# Altium PCB Ctrl-FOC-Lite.PcbDoc
Units mm, origin at the board's own origin, x right, y up, seen from the top; angles counter-clockwise.
Board outline 34.01 x 34.01 mm, 4 copper layers (Top1, Gnd2, Signal3, Bottom4), stack 1.043 mm thick; 59 components, 48 nets, 243 pads, 0 vias.
Unrouted connection lines stored in the file: 164.
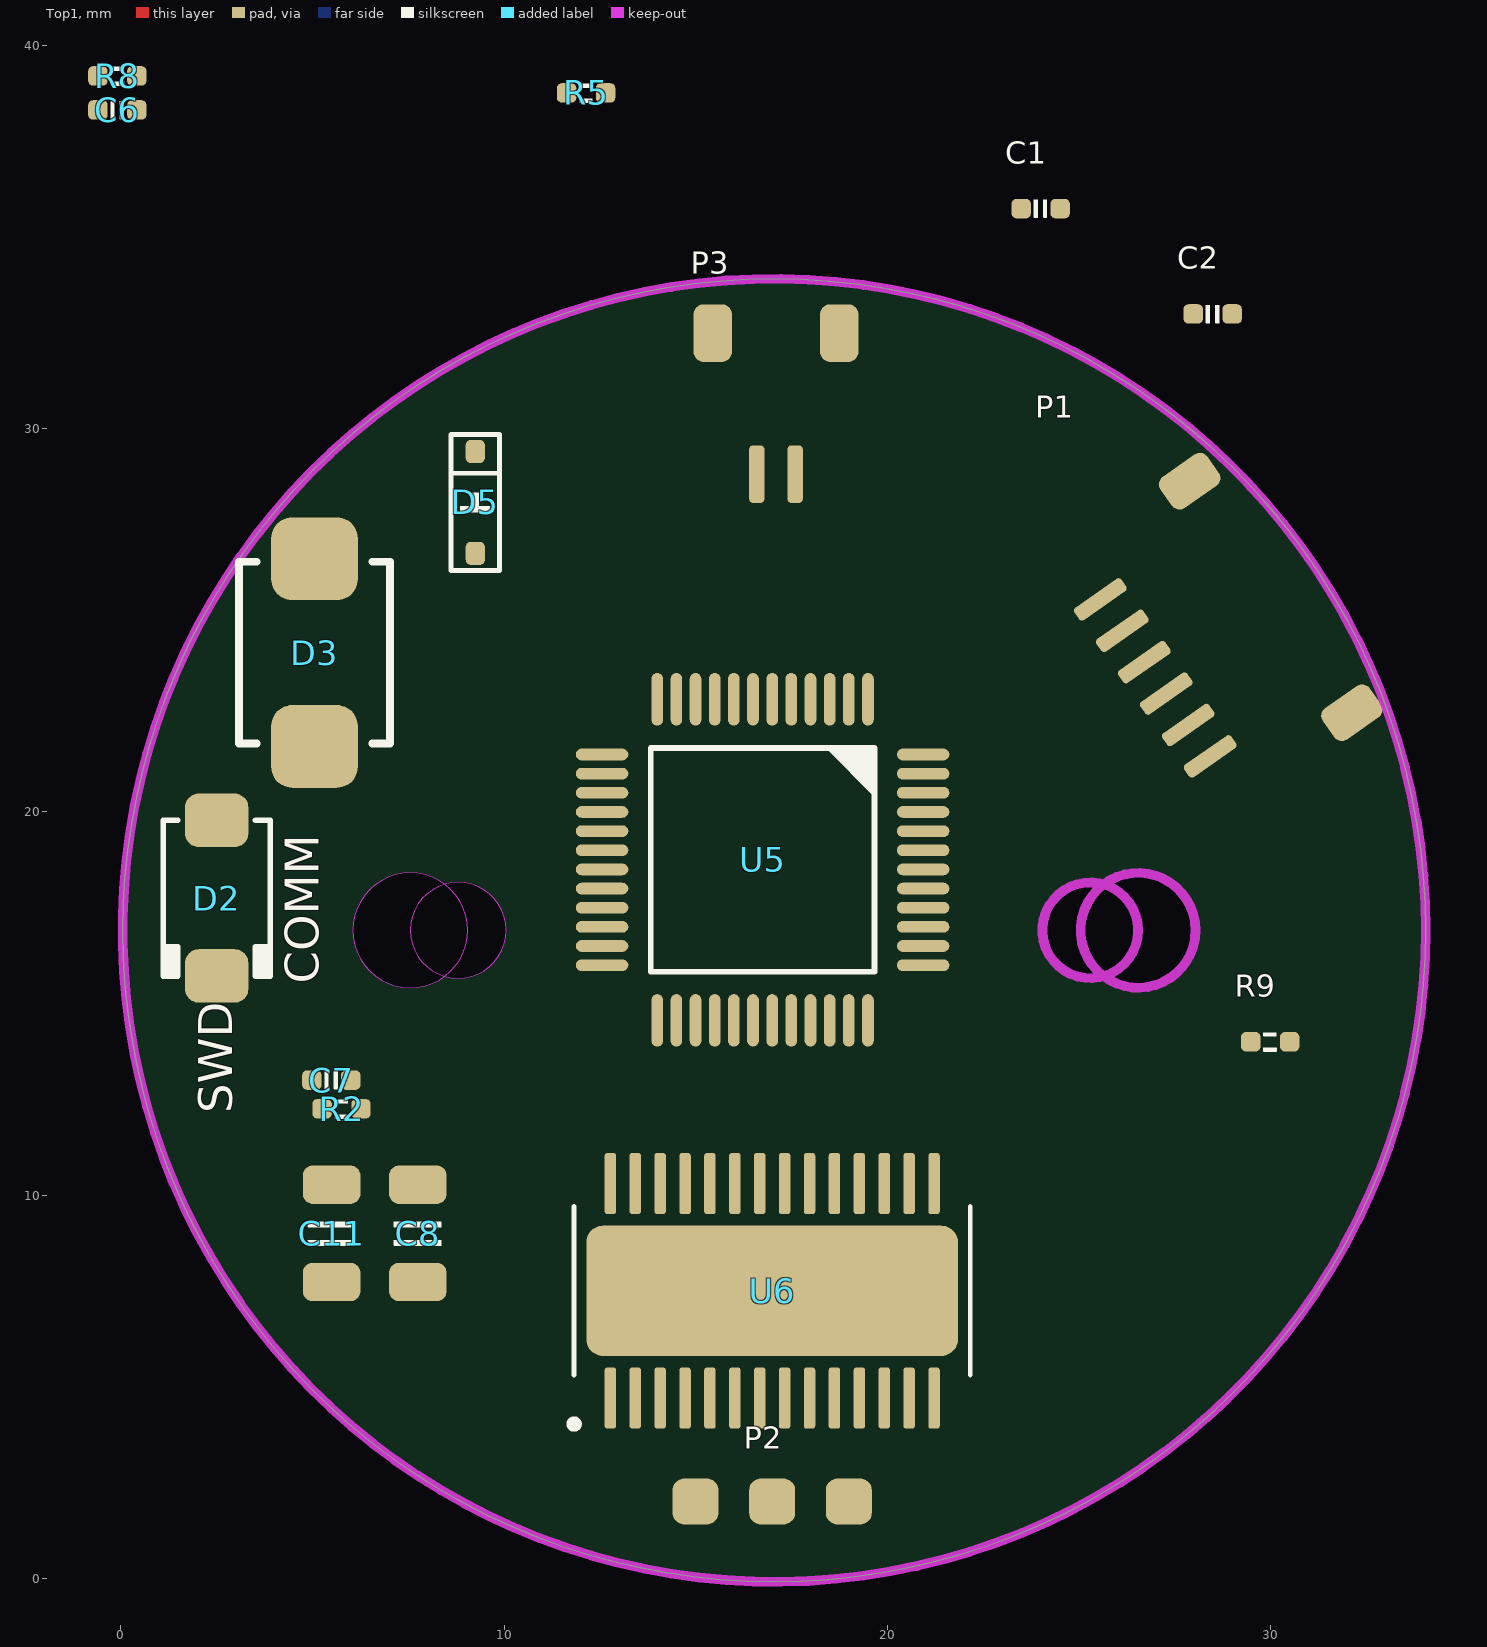
[diagram p0: Top1 view]
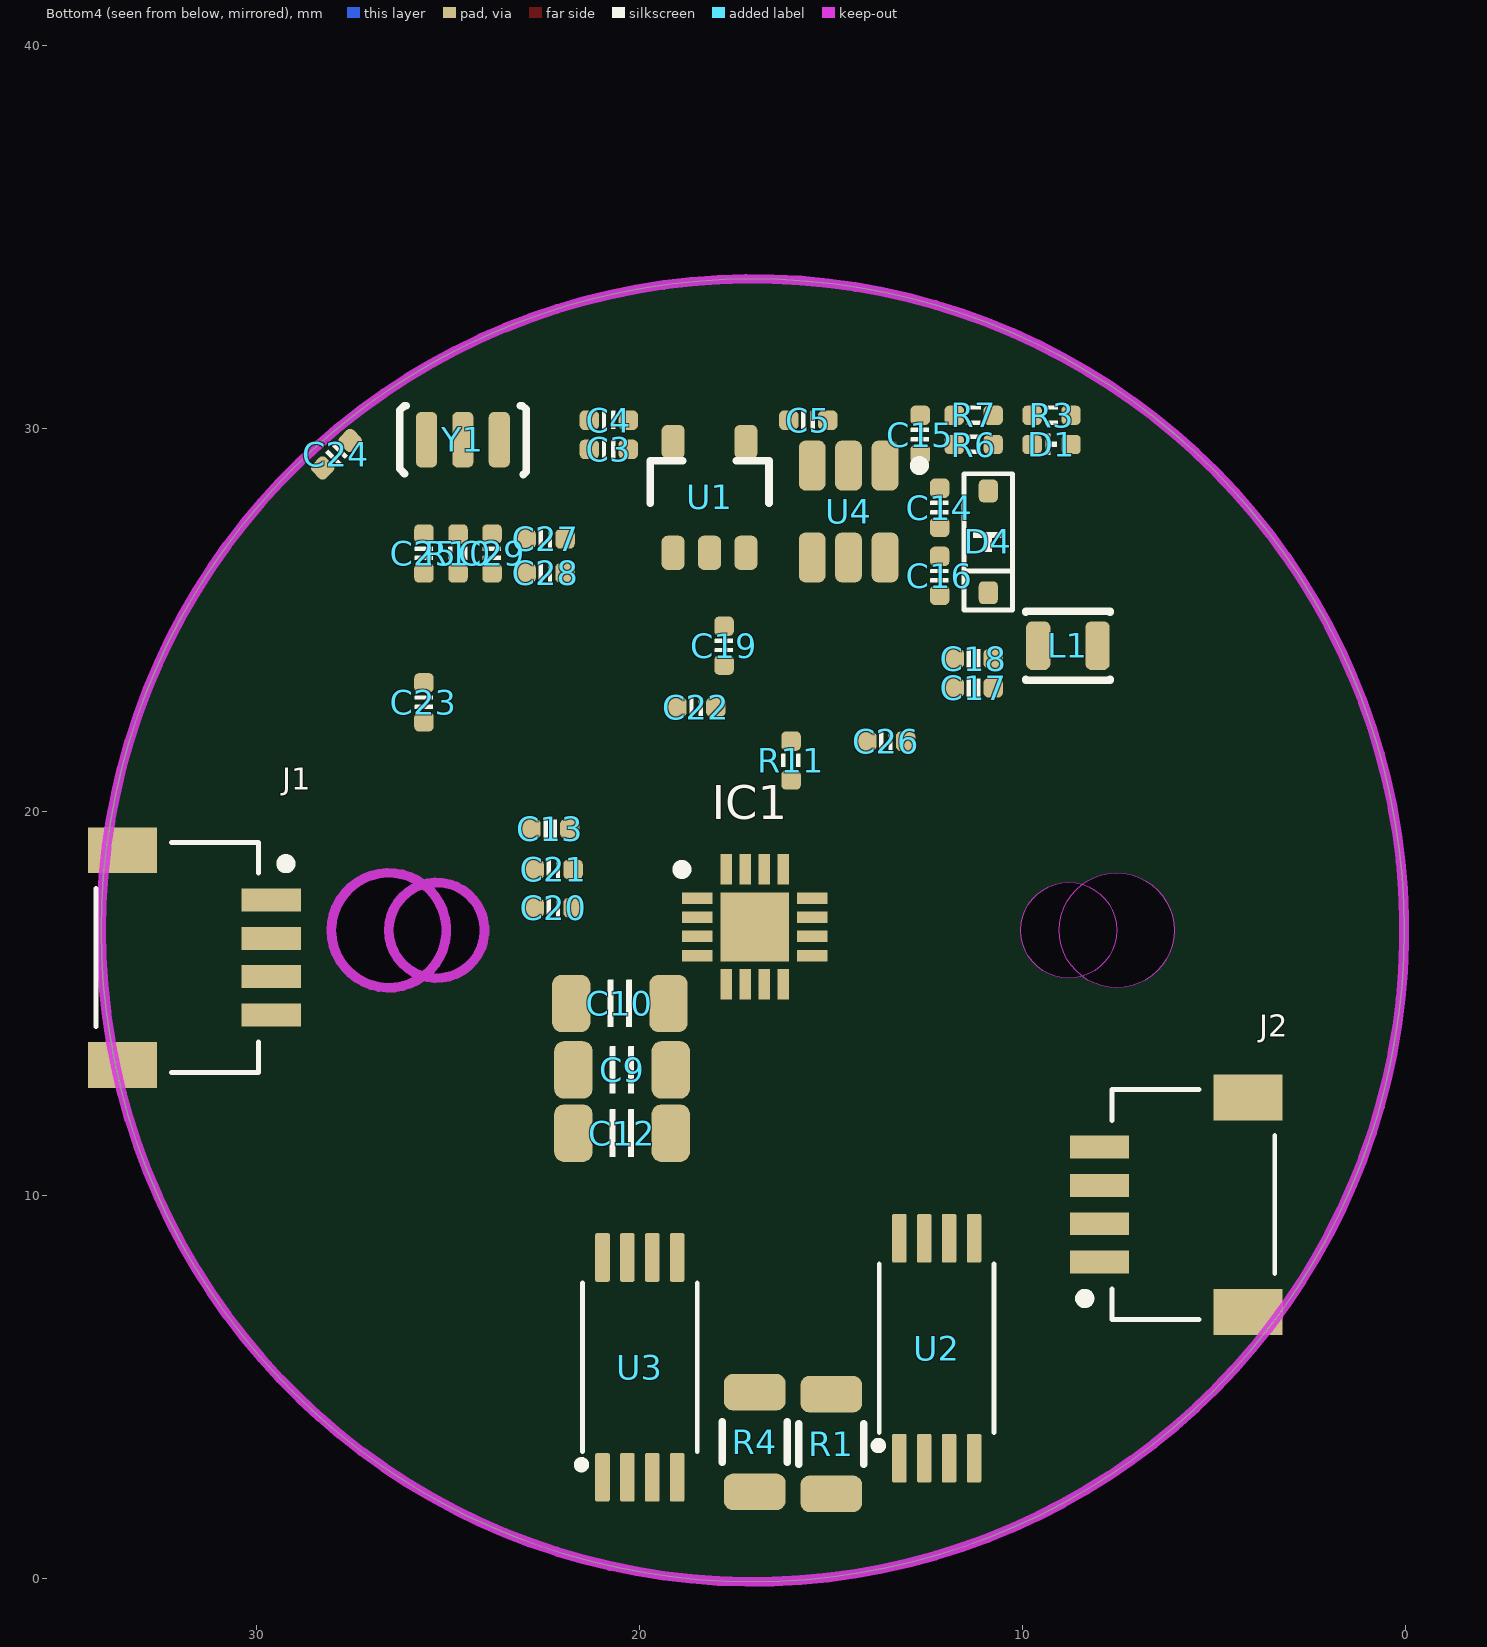
[diagram p1: Bottom4 view, seen from below]

## Layer stack, top to bottom
Top Solder: solder mask 0.0102, Solder Resist, Dk 3.5
Top1: signal copper 0.0356
Dielectric1: core 0.3, FR-4, Dk 4.2
Gnd2: signal copper 0.036
Dielectric 2: prepreg 0.3, Dk 4.2
Signal3: signal copper 0.036
Dielectric 3: core 0.3, Dk 4.2
Bottom4: signal copper 0.0356
Bottom Solder: solder mask 0.0102, Solder Resist, Dk 3.5

## Board outline
0.045,16.911 ccw(c17.053,16.911) 17.053,-0.097 ccw(c17.053,16.911) 34.06,16.911 ccw(c17.053,16.911) 17.053,33.918 ccw(c17.053,16.911)
cut-out: 24.053,16.911 ccw(c25.303,16.911) 25.303,15.661 ccw(c25.303,16.911) 26.553,16.911 ccw(c25.303,16.911) 25.303,18.161 ccw(c25.303,16.911)
cut-out: 7.553,16.911 ccw(c8.803,16.911) 8.803,15.661 ccw(c8.803,16.911) 10.053,16.911 ccw(c8.803,16.911) 8.803,18.161 ccw(c8.803,16.911)
cut-out: 6.053,16.911 ccw(c7.553,16.911) 7.553,15.411 ccw(c7.553,16.911) 9.053,16.911 ccw(c7.553,16.911) 7.553,18.411 ccw(c7.553,16.911)
cut-out: 25.053,16.911 ccw(c26.553,16.911) 26.553,15.411 ccw(c26.553,16.911) 28.053,16.911 ccw(c26.553,16.911) 26.553,18.411 ccw(c26.553,16.911)

## Design rules (kind name [scope] priority, off if disabled: settings)
Clearance Clearance_Logo [InNetClass('Logo')] p1: gap=0.203 ignorepadtopadclearanceinfootprint=FALSE
Clearance [All] p2: gap=0.102 ignorepadtopadclearanceinfootprint=FALSE except(0: Arc-Hole Track-Hole SMDPad-Hole THPad-Hole Via-Hole Fill-Hole Poly-Hole Region-Hole Text-Hole)
ComponentClearance [All] p1: gap=0 collisioncheckmode=3 verticalgap=0 showdistances=FALSE
DiffPairsRouting [All] p1: maxlimit=0.229 minlimit=0.229 mostfreqgap=0.229 toplayer_minwidth=0.381 toplayer_maxwidth=0.381 toplayer_prefwidth=0.381 midlayer1_minwidth=0.381 midlayer1_maxwidth=0.381 midlayer1_prefwidth=0.381 midlayer2_minwidth=0.381 midlayer2_maxwidth=0.381 midlayer2_prefwidth=0.381 bottomlayer_minwidth=0.381 bottomlayer_maxwidth=0.381 bottomlayer_prefwidth=0.381 maxuncoupledlength=12.7
FanoutControl Fanout_BGA [All] p1: bgadir=Out bgaviamode=Centered fanoutstyle=Auto fanoutdirection=Alternating viagrid=0.025 // Fanout_BGA (Default Rule)
HoleSize [All] p1: absolutevalues=TRUE maxlimit=254 minlimit=0.203 maxpercent=80.000 minpercent=20.000
MinimumSolderMaskSliver [All] p1 off: minsoldermaskwidth=0.051
PlaneClearance [All] p1: clearance=0.203
PlaneConnect [All] p1: planeconnectstyle=Direct reliefexpansion=0.508 reliefentries=4 reliefconductorwidth=0.254 reliefairgap=0.254
PolygonConnect [All] p1: connectstyle=Direct reliefconductorwidth=0.254 reliefentries=4 polygonreliefangle="90 Angle" airgapwidth=0.254
RoomDefinition Main [InComponentClass('Main')] p1: confinementstyle=ConfineIn formatcopy=TRUE lockcomponents=FALSE outline -185.298,-103.181 -134.498,-103.181 -134.498,-77.781 -185.298,-77.781
RoutingVias [All] p1: holewidth=0.203 width=0.406 viastyle="Through Hole" minholewidth=0.152 minwidth=0.305 maxholewidth=0.711 maxwidth=1.27
SilkToSilkClearance [All] p1: silktosilkclearance=0
SilkToSolderMaskClearance [IsPad] p1: minsilkscreentomaskgap=0 clearancetoexposedcopper=TRUE
SolderMaskExpansion [All] p1: expansion=0.076 istentingtop=FALSE
Width Logo [InNetClass('Logo')] p1: maxlimit=2.54 minlimit=0.003 preferedwidth=0.254
Width GND [(InNet('AGND') OR InNet('GND'))] p2: maxlimit=1.27 minlimit=0.102 preferedwidth=0.254
Width VCC [(InNet('VDD_SYS_3.3V') OR InNet('VDD_AV_3.3V') OR InNet('VDD_5V') OR InNet('VDD1V2-SYS') OR InNet('VDD1V1-EPHY') OR InNet('VDD-CPUX') OR InNet('VDD-CPUS') OR InNet('VDD-CPUFB') OR InNet('VCC-DRAM'))] p3: maxlimit=1.27 minlimit=0.102 preferedwidth=0.254
Width [All] p4: maxlimit=254 minlimit=0.102 preferedwidth=0.102
21 further rules are at their usual default settings.

## Classes and differential pairs
component class Main: C3 C4 C6 C7 C8 C9 C16 D1 D2 D3 D5 IC1 J1 J2 L1 P1 P2 P3 R1 R2 R5 R6 R7 R9 R11 U1 U2 U3 U4 U6 Y1

## Components (designator, comment, footprint, x,y, rotation, side; value= is the part's Value field where it differs from the comment)
C1 "0.1uF" CAP_0402 24.008,35.75 r0 top value=0.1u
C2 "1uF" CAP_0402 28.5,33 r0 top value=0.1u
C3 "0.1uF" CAP_0402 20.809,29.465 r180 bottom value=0.1u
C4 "10uF" CAP_0402 20.809,30.227 r180 bottom value=0.1u
C5 "10nF" CAP_0402 15.602,30.227 r0 bottom value=0.1u
C6 "0.1uF" CAP_0402 -0.093,38.325 r180 top value=0.1u
C7 "10uF" CAP_0402 5.492,13 r180 top value=0.1u
C8 "100uF" 1206-CAP 7.75,9 r90 top value=0.1u
C9 "100uF" 1206-CAP 20.464,13.265 r180 bottom value=0.1u
C10 "100uF" 1206-CAP 20.52,15 r180 bottom value=0.1u
C11 "100uF" 1206-CAP 5.5,9 r90 top value=0.1u
C12 "100uF" 1206-CAP 20.464,11.614 r180 bottom value=0.1u
C13 "0.1uF" CAP_0402 22.333,19.559 r0 bottom value=0.1u
C14 "0.1uF" CAP_0402 12.173,27.941 r270 bottom value=0.1u
C15 "100pF" CAP_0402 12.681,29.846 r90 bottom value=0.1u
C16 "0.1uF" CAP_0402 12.173,26.163 r90 bottom value=0.1u
C17 "0.1uF" CAP_0402 11.284,23.242 r0 bottom value=0.1u
C18 "10uF" CAP_0402 11.284,24.004 r0 bottom value=0.1u
C19 "10uF" CAP_0402 17.801,24.342 r90 bottom value=0.1u
C20 "10nF" CAP_0402 22.25,17.5 r180 bottom value=0.1u
C21 "0.1uF" CAP_0402 22.25,18.5 r180 bottom value=0.1u
C22 "0.1uF" CAP_0402 18.523,22.734 r0 bottom value=0.1u
C23 "0.1uF" CAP_0402 25.635,22.861 r270 bottom value=0.1u
C24 "0.1uF" CAP_0402 27.921,29.338 r135 bottom value=0.1u
C25 "0.1uF" CAP_0402 25.635,26.747 r90 bottom value=0.1u
C26 "0.47uF" CAP_0402 13.57,21.845 r180 bottom value=0.1u
C27 "0.1uF" CAP_0402 22.46,27.128 r180 bottom value=0.1u
C28 "10uF" CAP_0402 22.46,26.239 r180 bottom value=0.1u
C29 "0.1uF" CAP_0402 23.857,26.747 r90 bottom value=0.1u
D1 "color?" LED_0402_RED 9.252,29.592 r180 bottom
D2 "SS54" DO-214AC 2.5,17.75 r270 top
D3 "SMBJ28CA" SMBJ-CA_MFG 5.053,24.161 r270 top
D4 "二极管-5B5819WS" SOD-323 10.903,27.052 r270 bottom
D5 "二极管-5B5819WS" SOD-323 9.25,28.079 r90 top
IC1 "MA730GQ-Z" QFN50P300X300X100-17N-D 17,17 r180 bottom
J1 "SM04B-SRSS-TB(LF)(SN)" JST_SM04B-SRSS-TB(LF)(SN) 29.625,16.2 r270 bottom
J2 "SM04B-SRSS-TB(LF)(SN)" JST_SM04B-SRSS-TB(LF)(SN) 8,9.75 r90 bottom
L1 "6.8uH" IND-201612 8.825,24.342 r180 bottom
P1 "SH1.0-6P" SH1.0-6P 27,23.5 r125 top
P2 "电机接插件-3P" AMASS-MR30-M 17,2 r0 top
P3 "SH1.0-2P" SH1.0-2P 17.099,28.817 r180 top
R1 "0.01R" 1206-RES 15,3.5 r90 bottom value=22R
R2 "NCP15XH103F03RC" RES_0402 5.758,12.25 r0 top value=10k
R3 "2K" RES_0402 9.252,30.354 r180 bottom value=22R
R4 "0.01R" 1206-RES 17,3.551 r270 bottom value=22R
R5 "3.3K" RES_0402 12.142,38.769 r180 top value=22R
R6 "10K" RES_0402 11.284,29.592 r0 bottom value=22R
R7 "1.8K" RES_0402 11.284,30.354 r0 bottom value=22R
R8 "1M" RES_0402 -0.093,39.214 r0 top value=22R
R9 "10K" RES_0402 30,14 r0 top value=22R
R10 "10K" RES_0402 24.746,26.747 r270 bottom value=22R
R11 "10K" RES_0402 16.051,21.342 r270 bottom value=22R
U1 "LP2992 3V3" SOT23-5 18.18,28.266 r90 bottom
U2 "INA240A2PWR" "SOP65 P640X120-8N" 12.25,6 r90 bottom
U3 "INA240A2PWR" "SOP65 P640X120-8N" 20,5.5 r90 bottom
U4 "ME3116" SOT23-6 14.551,27.842 r270 bottom
U5 "STM32F103CBT6" LQFP-48 16.75,18.75 r270 top
U6 "DRV8313PWP" HTSSOP-28 17,7.5 r90 top
Y1 "8MHz" 晶振-3P 24.619,29.719 r0 bottom

## Footprints (in the part's own frame and the unit in brackets; to place one, negate y for a bottom-side part, rotate by r counter-clockwise, add the part's x,y. Pads: shape width x height; smd on the part's side, far side on the other; paste and mask are expansions set on the pad)
1206-CAP [mm]
  rrect50% 1x1.5 smd: 1(-1.27,0) 2(1.27,0)
  silkscreen extent -0.3,-0.61 0.3,0.61, body extent -1.5,-0.75 1.5,0.75, height 1.5
1206-RES [mm]
  rrect50% 0.956x1.61 smd paste+0 mask+0: 1(-1.301,0) 2(1.301,0)
  silkscreen extent -0.52,-0.85 0.52,0.85, body extent -1.55,-0.77 1.55,0.77, height 0.65
AMASS-MR30-M [mm]
  rrect50% 1.2x1.2 smd: 1(-2,0) 2(0,0) 3(2,0)
  body extent -6.1,-11.84 6.1,0.66, height 2.6
CAP_0402 [mil]
  rrect50% 20x20 smd: 1(-20,0) 2(20,0)
  silkscreen extent -6,-9 6,9, body extent -20,-10 20,10, height 20
DO-214AC [mil] "SMA"
  rrect50% 55x65 smd: 1(-80,0) 2(80,0)
  silkscreen extent -80,-55 80,55, body extent -98,-53 98,53, height 85
HTSSOP-28 [mm]
  rrect50% 1.6x0.3 smd paste-2 mask+0: 1(-2.8,4.225) 2(-2.8,3.575) 3(-2.8,2.925) 4(-2.8,2.275) 5(-2.8,1.625) 6(-2.8,0.975) 7(-2.8,0.325) 8(-2.8,-0.325) 9(-2.8,-0.975) 10(-2.8,-1.625) 11(-2.8,-2.275) 12(-2.8,-2.925) 13(-2.8,-3.575) 14(-2.8,-4.225) 15(2.8,-4.225) 16(2.8,-3.575) 17(2.8,-2.925) 18(2.8,-2.275) 19(2.8,-1.625) 20(2.8,-0.975) 21(2.8,-0.325) 22(2.8,0.325) 23(2.8,0.975) 24(2.8,1.625) 25(2.8,2.275) 26(2.8,2.925) 27(2.8,3.575) 28(2.8,4.225)
  rrect25% 3.4x9.7 smd paste-6 mask+0: 29(0,0)
  silkscreen extent -3.58,-5.17 2.2,5.27, body extent -3.2,-4.85 3.2,4.85, height 1.2
IND-201612 [mm]
  rrect50% 0.635x1.27 smd paste+0 mask+0: 1(-0.774,0) 2(0.774,0)
  silkscreen extent -1.1,-0.9 1.1,0.9, body extent -1,-0.8 1,0.8, height 0.95
JST_SM04B-SRSS-TB(LF)(SN) [mm]
  rect 0.6x1.55 smd: 1(-1.5,0) 2(-0.5,0) 3(0.5,0) 4(1.5,0)
  rect 1.2x1.8 smd: S1(-2.8,-3.875) S2(2.8,-3.875)
  silkscreen extent -3,-4.57 3,0.48, body extent -3,-4.78 3,0.17, height 3.25
LED_0402_RED [mil]
  rrect50% 20x20 smd: 1(-20,0) 2(20,0)
  silkscreen extent -6,-10 6,10, body extent -20,-10 20,10, height 18
LQFP-48 [mil]
  oval 54x12 smd: 1(-165,108.27) 2(-165,88.58) 3(-165,68.9) 4(-165,49.21) 5(-165,29.53) 6(-165,9.84) 7(-165,-9.84) 8(-165,-29.53) 9(-165,-49.21) 10(-165,-68.9) 11(-165,-88.58) 12(-165,-108.27) 25(165,-108.27) 26(165,-88.58) 27(165,-68.9) 28(165,-49.21) 29(165,-29.53) 30(165,-9.84) 31(165,9.84) 32(165,29.53) 33(165,49.21) 34(165,68.9) 35(165,88.58) 36(165,108.27)
  oval 12x54 smd: 13(-108.27,-165) 14(-88.58,-165) 15(-68.9,-165) 16(-49.21,-165) 17(-29.53,-165) 18(-9.84,-165) 19(9.84,-165) 20(29.53,-165) 21(49.21,-165) 22(68.9,-165) 23(88.58,-165) 24(108.27,-165) 37(108.27,165) 38(88.58,165) 39(68.9,165) 40(49.21,165) 41(29.53,165) 42(9.84,165) 43(-9.84,165) 44(-29.53,165) 45(-49.21,165) 46(-68.9,165) 47(-88.58,165) 48(-108.27,165)
  silkscreen extent -115,-115 115,115, body extent -177,-177 177,177, height 61
QFN50P300X300X100-17N-D [mm]
  rect 0.8x0.3 smd: 1(-1.5,0.75) 2(-1.5,0.25) 3(-1.5,-0.25) 4(-1.5,-0.75) 9(1.5,-0.75) 10(1.5,-0.25) 11(1.5,0.25) 12(1.5,0.75)
  rect 0.3x0.8 smd: 5(-0.75,-1.5) 6(-0.25,-1.5) 7(0.25,-1.5) 8(0.75,-1.5) 13(0.75,1.5) 14(0.25,1.5) 15(-0.25,1.5) 16(-0.75,1.5)
  rect 1.8x1.8 smd: 17(0,0)
  silkscreen extent -2.02,1.38 -1.78,1.62, body extent -1.55,-1.55 1.55,1.55, height 1
RES_0402 [mil]
  rrect50% 20x20 smd: 1(-20,0) 2(20,0)
  silkscreen extent -6,-10 6,10, body extent -20,-10 20,10, height 14
SH1.0-2P [mm]
  rrect50% 0.4x1.5 smd: 1(-0.5,0) 2(0.5,0)
  rrect50% 1x1.5 smd: SH1(-1.651,-3.683) SH2(1.651,-3.683)
  body extent -2,-4.42 2,0.54, height 3.06
SH1.0-6P [mm]
  rrect50% 0.4x1.5 smd: 1(-2.5,0) 2(-1.5,0) 3(-0.5,0) 4(0.5,0) 5(1.5,0) 6(2.5,0)
  rrect50% 1x1.5 smd: SH1(-3.691,-3.683) SH2(3.691,-3.683)
  body extent -4,-4.42 4,0.54, height 3.14
SMBJ-CA_MFG [mm]
  rrect50% 2.16x2.26 smd paste+0 mask+0: 1(-2.45,0) 2(2.45,0)
  silkscreen extent -2.37,-1.97 2.37,1.97, body extent -2.7,-1.81 2.7,1.81, height 2.62
SOD-323 [mm]
  rrect50% 0.6x0.5 smd: 1(-1.329,0) 2(1.329,0)
  silkscreen extent -1.78,-0.64 1.78,0.64, body extent -1.3,-0.68 1.3,0.67, height 1.15
"SOP65 P640X120-8N" [mm]
  rrect25% 1.27x0.381 smd: 1(-2.87,0.975) 2(-2.87,0.325) 3(-2.87,-0.325) 4(-2.87,-0.975) 5(2.87,-0.975) 6(2.87,-0.325) 7(2.87,0.325) 8(2.87,0.975)
  silkscreen extent -2.64,-1.5 2.2,1.62, body extent -3.2,-1.5 3.2,1.5, height 1.2
SOT23-5 [mm] "SOT23, 3-Leads, Body 3.1x3.0mm (max), Pitch 0.95mm, IPC Medium Density"
  rrect50% 0.889x0.6 smd: 1(-1.5,0.95) 2(-1.5,0) 3(-1.5,-0.95) 4(1.396,-0.95) 5(1.396,0.95)
  silkscreen extent -0.2,-1.55 0.9,1.55, body extent -1.48,-1.45 1.32,1.45, height 1.2
SOT23-6 [mm]
  rrect50% 1.3x0.7 smd: 1(-1.2,0.95) 2(-1.2,0) 3(-1.2,-0.95) 4(1.2,-0.95) 5(1.2,0) 6(1.2,0.95)
  silkscreen extent -1.32,1.73 -1.08,1.97, body extent -1.4,-1.45 1.4,1.45, height 1.45
晶振-3P [mm] "贴片晶振"
  rrect50% 0.55x1.45 smd: 1(-0.95,0) 2(0,0) 3(0.95,0)
  silkscreen extent -1.65,-0.89 1.65,0.91, body extent -1.6,-0.89 1.65,0.89, height 0.7

## Part data
C1 C2: "Capacitor"
C3 C4 C5 C6 C7 C13 C14 C15 C16 C17 C18 C19 C20 C21 C22 C23 C24 C25 C26 C27 C28 C29: library part 电容-0402, "Capacitor"
C8 C9 C10 C11 C12: library part 电容-1206, "Capacitor"
D1: library part LED_0402, "LED", Type=0402
D2: library part Diode_SMA, "Diode", Type=SMA
D4 D5: library part 二极管-5B5817WS, "40V"
IC1: "Integrated Circuit", Manufacturer_Name="Monolithic Power Systems (MPS)", Mouser Part Number=946-MA730GQ-Z, Datasheet Link=https://www.monolithicpower.com/pub/media/document/m/a/ma730_r1.01.pdf, Height=1mm, Manufacturer_Part_Number=MA730GQ-Z, Mouser Price/Stock=https://www.mouser.co.uk/ProductDetail/Monolithic-Power-Systems-MPS/MA730GQ-Z?qs=YCa%2FAAYMW01z3klrRj76PA%3D%3D
J1 J2: "Connector Header Surface Mount, Right Angle 4 position 0.039 _1.00mm_", Package=None, Availability=Unavailable, MF="JST Sales", MP=SM04B-SRSS-TB_LF__SN_, Price=None, SnapEDA_Link=https://www.snapeda.com/parts/SM04B-SRSS-TB%28LF%29%28SN%29/JST%20Sales%20America%20Inc./view-part/557466/?ref=snap
L1: library part 电感-201612
P2: "AMASS MR30"
R1 R4: library part 电阻-1206, "Resistor"
R2: "THERMISTOR 10K OHM NTC 0402 SMD"
R3 R5 R6 R7 R8 R9 R10 R11: library part 电阻-0402, "Resistor"
U1: library part LP2992, "LDO"
U2 U3: "-4 to 80V, bidirectional, ultra-precise current sense amplifier with enhanced PWM rejection 8-TSSOP -40 to 125", Package="TSSOP-8 Texas Instruments", Availability=Good, MF="Texas Instruments", MP=INA240A2PWR, Price=None, Purchase-URL=https://pricing.snapeda.com/search/part/INA240A2PWR/?ref=eda, SnapEDA_Link=https://www.snapeda.com/parts/INA240A2PWR/Texas%20Instruments/view-part/588604/?ref=snap
U4: "DC-DC"
U5: "ARM Cortex-M3 32-bit MCU, 128 KB Flash, 20 KB Internal RAM, 37 I/Os, 48-pin LQFP, -40 to 85 degC, Tray", I/Os (High Current)=37, Operating Frequency(F) (Processor speed) (MHz)=72, Supplier Part Number 1=497-6288-ND, Supply Voltage(Vcc) min (V)=2, A/D Converter="2x12-bit (10 Channel)", ComponentLink1Description="Manufacturer URL", ComponentLink1URL=http://www.st.com/web/en/home.html, ComponentLink2Description=Datasheet, ComponentLink2URL=http://www.st.com/st-web-ui/static/active/en/resource/technical/document/datasheet/CD00161566.pdf, ComponentLink3Description="Package Specification", ComponentLink3URL=http://www.st.com/st-web-ui/static/active/en/resource/technical/document/datasheet/DM00058181.pdf, Core="ARM Cortex-M3", DatasheetVersion="Rev. 16", FLASH Size (Prog) (kB)=128, Internal RAM Size (kB)=20, Mounting Technology="Surface Mount", PackageDescription="48-Pin Low Profile Quad Flat Package, 7 x 7 mm Body, 0.5 mm Pitch", PackageReference=LQFP48, PackageVersion="Rev. 6, 06/2013", Packing=Tray, PartNumber=STM32F103CBT6, Supplier 1=Digi-Key, Supplier 2=Farnell, Supplier 3=Newark, Supplier 4=Newark, Supplier 5=Mouser, Supplier Part Number 2=1606327, Supplier Part Number 3=11N8296, Supplier Part Number 4=57P1214, Supplier Part Number 5=511-STM32F103CBT6
U6: "65-V max, 3-A peak 3-phase motor driver 28-HTSSOP -40 to 125", Package="HTSSOP-28 Texas Instruments", Availability=Good, MF="Texas Instruments", MP=DRV8313PWP, Price=None, Purchase-URL=https://pricing.snapeda.com/search/part/DRV8313PWP/?ref=eda, SnapEDA_Link=https://www.snapeda.com/parts/DRV8313PWP/Texas%20Instruments/view-part/287728/?ref=snap
Y1: library part 晶振-3Pin, "村田贴片"

## Nets (pads, with @x,y where several pads share a name; then routed paths per layer and width w, separated by ;. In a path a pad name is that pad's centre, name@x,y a point inside that pad or via, vN(x,y) a via of type N, cw(c..) or ccw(c..) an arc to the next point about the centre after c; other vN are vias at no path point)
3V3: C1.1 C2.1 C3.2 C4.2 C6.1 C13.1 C22.2 C23.2 C24.2 C25.2 C27.2 C28.2 D1.1 IC1.13 J1.3 J2.3 P1.6 R2.2 R10.2 U1.5 U2.5 U2.6 U3.5 U3.6 U5.1 U5.9 U5.24 U5.36 U5.48
5V: C15.1 C17.2 C18.2 L1.2 R6.2 U1.1 U1.3
ADC1_1: C7.2 R2.1 R5.2 U5.18
AGND: C1.2 C2.2 C3.1 C4.1 C5.1 C6.2 C7.1 C8.1 C9.1 C10.1 C11.1 C12.1 C13.2 C17.1 C18.1 C19.1 C22.1 C23.1 C24.1 C25.1 C26.1 C27.1 C28.1 C29.1 D3.1 D4.1 IC1.8 IC1.17 J1.4 J1.S1 J1.S2 J2.4 J2.S1 J2.S2 P1.5 P3.1 R5.1 R7.1 R9.1 U1.2 U2.4 U2.7 U3.4 U3.7 U4.2 U5.8 U5.23 U5.35 U5.47 U6.6 U6.7 U6.10 U6.12 U6.13 U6.14 U6.20 U6.28 U6.29 Y1.2
DRV_EN_1: U5.32 U6.22 U6.24 U6.26
DRV_FAULT_1: R11.2 U5.3 U6.18
I2C1_SCL_1: U5.42
I2C1_SDA_1: U5.43
LED1_1: R3.1 U5.2
MOTOR_A_1: P2.1 R1.1 U2.2
MOTOR_A_CS_1: R1.2 U2.3 U6.5
MOTOR_B_1: P2.2 R4.2 U3.3
MOTOR_B_CS_1: R4.1 U3.2 U6.8
MOTOR_C_1: P2.3 U6.9
NetC5_2: C5.2 U1.4
NetC14_1: C14.1 C16.1 D4.2 L1.1 U4.6
NetC14_2: C14.2 C16.2 U4.1
NetC15_2: C15.2 R6.1 R7.2 U4.3
NetC19_2: C19.2 D5.2 R8.1 U4.5
NetC20_1: C20.1 U6.1
NetC20_2: C20.2 U6.2
NetC21_1: C21.1 U6.3
NetD1_2: D1.2 R3.2
NetR8_2: R8.2 U4.4
NetR9_2: R9.2 U5.44
NetU5_5: U5.5 Y1.3
NetU5_6: U5.6 Y1.1
NRST_1: C29.2 R10.1 U5.7
PWM_A_1: U5.29 U6.27
PWM_B_1: U5.30 U6.25
PWM_C_1: U5.31 U6.23
SENSE_A_1: U2.8 U5.10
SENSE_B_1: U3.8 U5.11
SPI1_CS_1: IC1.5 U5.14
SPI1_MISO_1: IC1.7 U5.16
SPI1_MOSI_1: IC1.4 U5.17
SPI1_SCK_1: IC1.12 U5.15
SPI2_CS_1: P1.1 U5.25
SPI2_MISO_1: P1.3 U5.27
SPI2_MOSI_1: P1.4 U5.28
SPI2_SCK_1: P1.2 U5.26
SWCLK_1: J1.1 U5.37
SWDIO_1: J1.2 U5.34
UART_Rx_1: J2.2 U5.13
UART_Tx_1: J2.1 U5.12
V3P3_1: C26.2 R11.1 U6.15 U6.16 U6.17
VCC: C8.2 C9.2 C10.2 C11.2 C12.2 C21.2 D2.2 D3.2 D5.1 P3.2 U6.4 U6.11
VCC_IN: D2.1
pads on no net: IC1.1 IC1.2 IC1.3 IC1.6 IC1.9 IC1.10 IC1.11 IC1.14 IC1.15 IC1.16 P1.SH1 P1.SH2 P3.SH1 P3.SH2 U2.1 U3.1 U5.4 U5.19 U5.20 U5.21 U5.22 U5.33 U5.38 U5.39 U5.40 U5.41 U5.45 U5.46 U6.19 U6.21

## Keep-outs
Keep-Out Layer:
  circle w0.254: c25.303,16.911 r1.25
  circle w0.254: c26.553,16.911 r1.5
  circle w0.254: c17.053,16.911 r17.007

## Other copper
Multi-Layer:
  pour cut-out: 7.553,16.911 ccw(c8.803,16.911) 8.803,15.661 ccw(c8.803,16.911) 10.053,16.911 ccw(c8.803,16.911) 8.803,18.161 ccw(c8.803,16.911)

## Silkscreen, mask and mechanical layers (free items; w line width, h text height)
Top Overlay:
  text "COMM" at 5.461,15.514 h1.52 r90
  text "SWD" at 3.211,12.141 h1.52 r90
Bottom Solder:
  lines w0.178: 4.411,19.904 4.411,24.756
  text "max" at 3.116,22.542 h1.02 r270
  text "24V" at 4.208,21.311 h2.03 r270
  text "Vin" at 4.208,19.328 h1.27 r270
Mechanical 1:
  circle w0.254: c17,17 r8.25
  circle w0.254: c17,17 r9.5
  lines w0.254: 0,17 34,17 ; 17,34 17,0 ; 17,0 0,0 0,34 34,34 34,0 17,0